# Altium PCB Monitor_Board.PcbDoc (part 2 of 5)
Units mil, origin at the board's own origin, x right, y up, seen from the top; angles counter-clockwise.
Board outline 3921.03 x 2556.03 mil, 4 copper layers (Top Layer, GND02, PWR03, Bottom Layer), stack 23.756 mil thick; 93 components, 142 nets, 522 pads, 264 vias.
Unrouted connection lines stored in the file: 39.
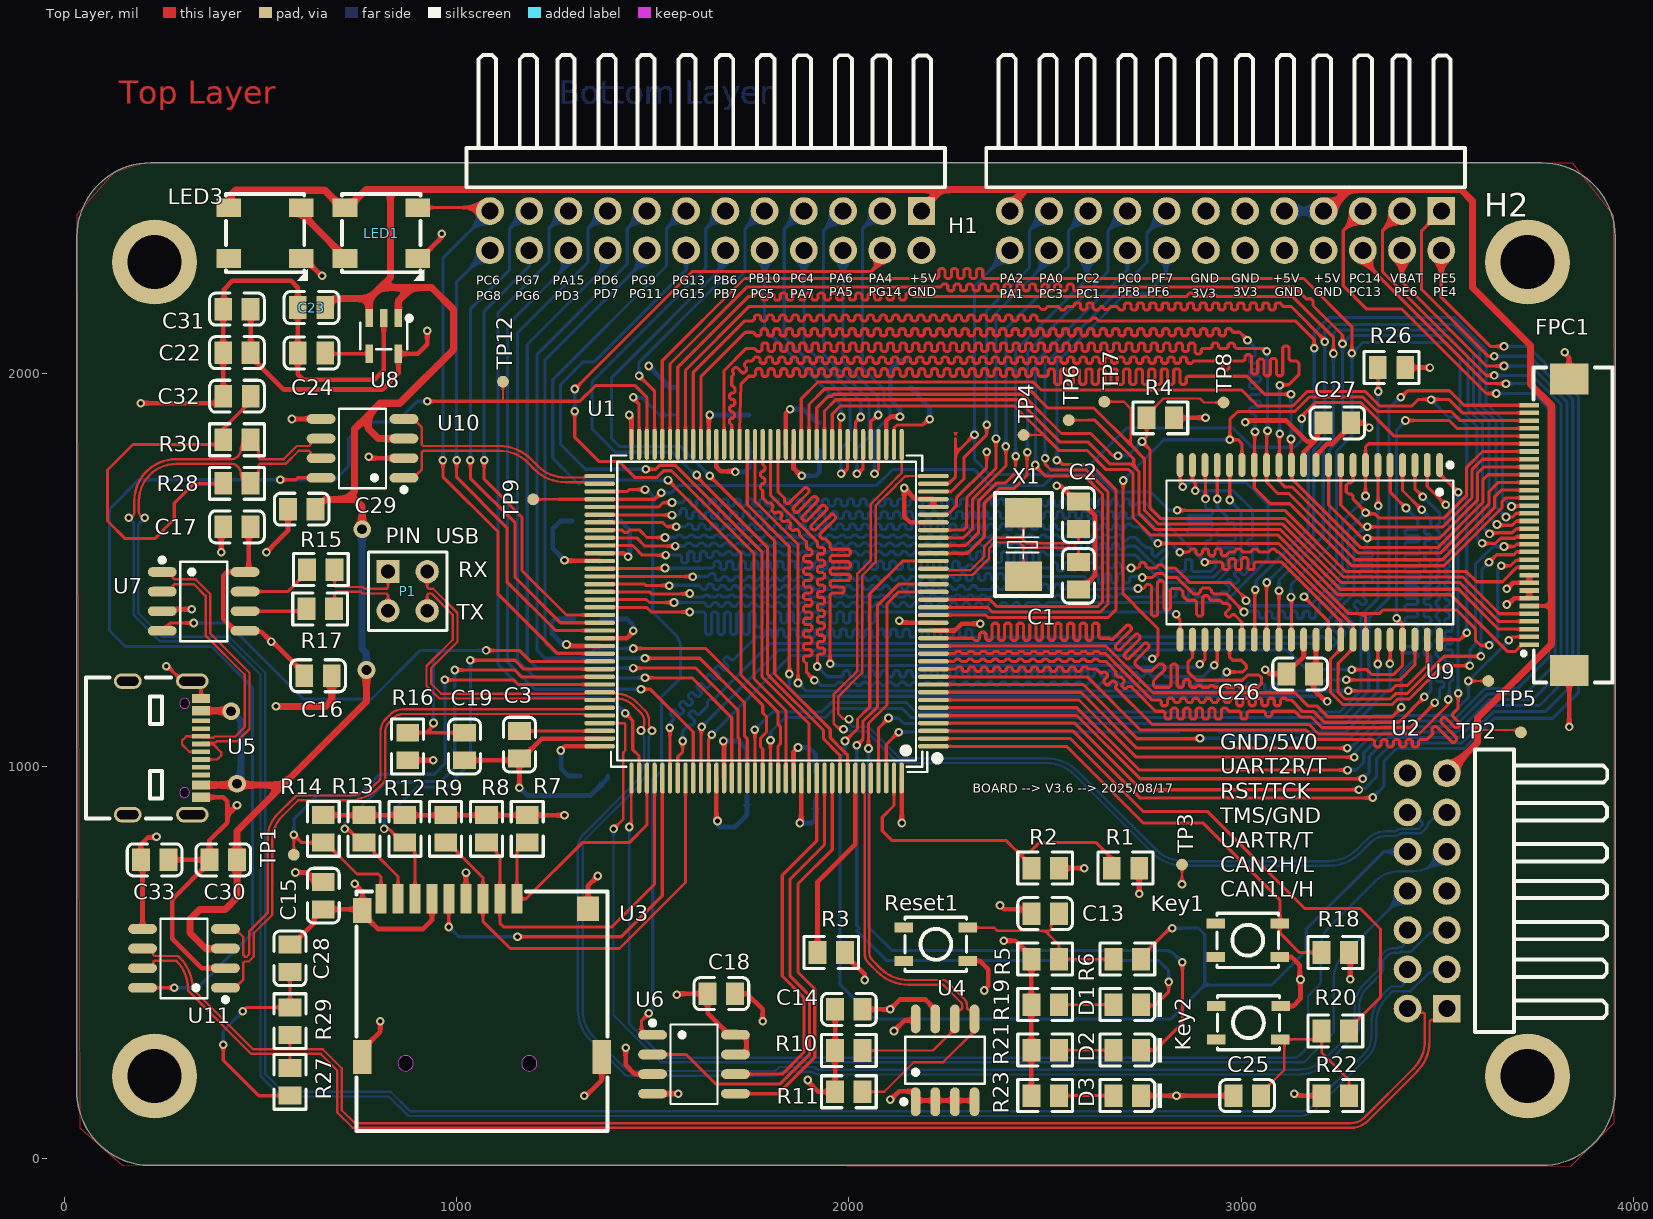
[diagram p0: Top Layer view]

## Via types
v1: diameter 22, hole 12, Top Layer to Bottom Layer, tented both sides, 259 vias
v2: diameter 45, hole 25, Top Layer to Bottom Layer, tented both sides, 4 vias
v3: diameter 22/22 (per signal layer), hole 12, Top Layer to Bottom Layer, tented both sides, 1 vias

## Nets (pads, with @x,y where several pads share a name; then routed paths per layer and width w, separated by ;. In a path a pad name is that pad's centre, name@x,y a point inside that pad or via, vN(x,y) a via of type N, cw(c..) or ccw(c..) an arc to the next point about the centre after c; other vN are vias at no path point) (continued)
FPC_LCD_D3: (continued)
  Bottom Layer w8: v1(1576,1064) 1576,1090 1581.66,1095.66 1590.59,1104.59 1595.36,1104.59 1601.01,1104.59 1606.67,1110.24 1606.67,1115.9 1604.28,1118.28 1592.94,1129.63 1592.94,1135.29 1598.59,1140.95 1604.25,1140.95 1612.77,1132.43 1618.43,1132.43 1620,1134 1636.5,1150.5 1639.33,1153.33 1639.33,1158.99 1639.33,1164.64 1644.99,1170.3 1650.64,1170.3 1656.3,1170.3 1662.5,1176.5 1799,1313 3183.37,1313 3186,1313 3194.21,1321.21 3202.69,1329.69 3208.35,1329.69 3230.98,1307.06 3236.63,1307.06 3242.29,1312.72 3242.29,1318.38 3219.66,1341.01 3219.66,1346.66 3225.32,1352.32 3230.98,1352.32 3253.6,1329.69 3259.26,1329.69 3264.92,1335.35 3264.92,1341.01 3242.29,1363.63 3242.29,1369.29 3247.95,1374.95 3253.6,1374.95 3276.23,1352.32 3281.89,1352.32 3287.54,1357.98 3287.54,1363.63 3264.92,1386.26 3264.92,1391.92 3270.57,1397.57 3276.23,1397.57 3284.68,1389.13 3290.33,1389.13 3295.99,1394.79 3295.99,1400.44 3287.54,1408.89 3287.54,1414.54 3293.2,1420.2 3298.86,1420.2 3307.3,1411.76 3312.96,1411.76 3318.62,1417.41 3318.62,1423.07 3310.17,1431.51 3310.17,1437.17 3313,1440 3313,1445.78 3313,1452.8 3313,1464.8 3317,1468.8 3331,1468.8 3335,1472.8 3335,1480.8 3331,1484.8 3313,1484.8 3305.2,1484.8 3301.2,1488.8 3301.2,1496.8 3305.2,1500.8 3313,1500.8 3331,1500.8 3335,1504.8 3335,1512.8 3331,1516.8 3313,1516.8 3305.2,1516.8 3301.2,1520.8 3301.2,1528.8 3305.2,1532.8 3313,1532.8 3331,1532.8 3335,1536.8 3335,1544.8 3331,1548.8 3317,1548.8 3313,1552.8 3313,1556.8 3321,1564.8 v1(3321,1581)